# Altium PCB ISO-ASS[3]-R.PcbDoc
Units mm, origin at the board's own origin, x right, y up, seen from the top; angles counter-clockwise.
Board outline 240 x 60 mm, 2 copper layers (Top Layer, Bottom Layer); 123 components, 15 nets, 691 pads, 5 vias.
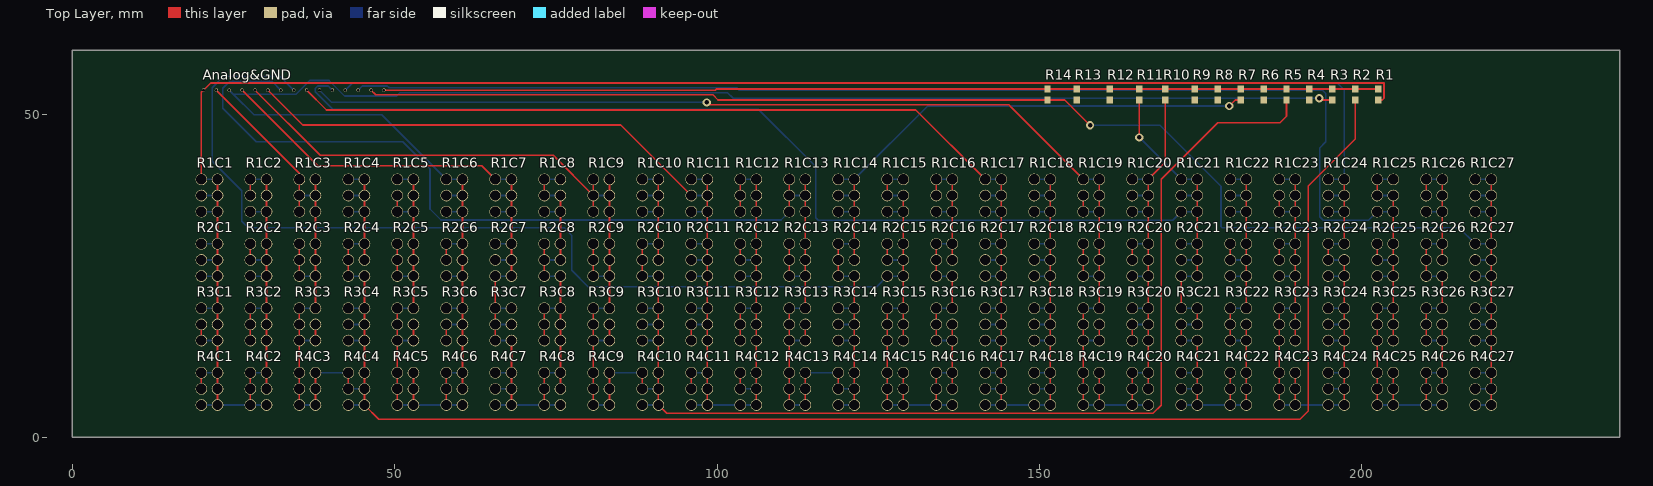
[diagram p0: Top Layer view]
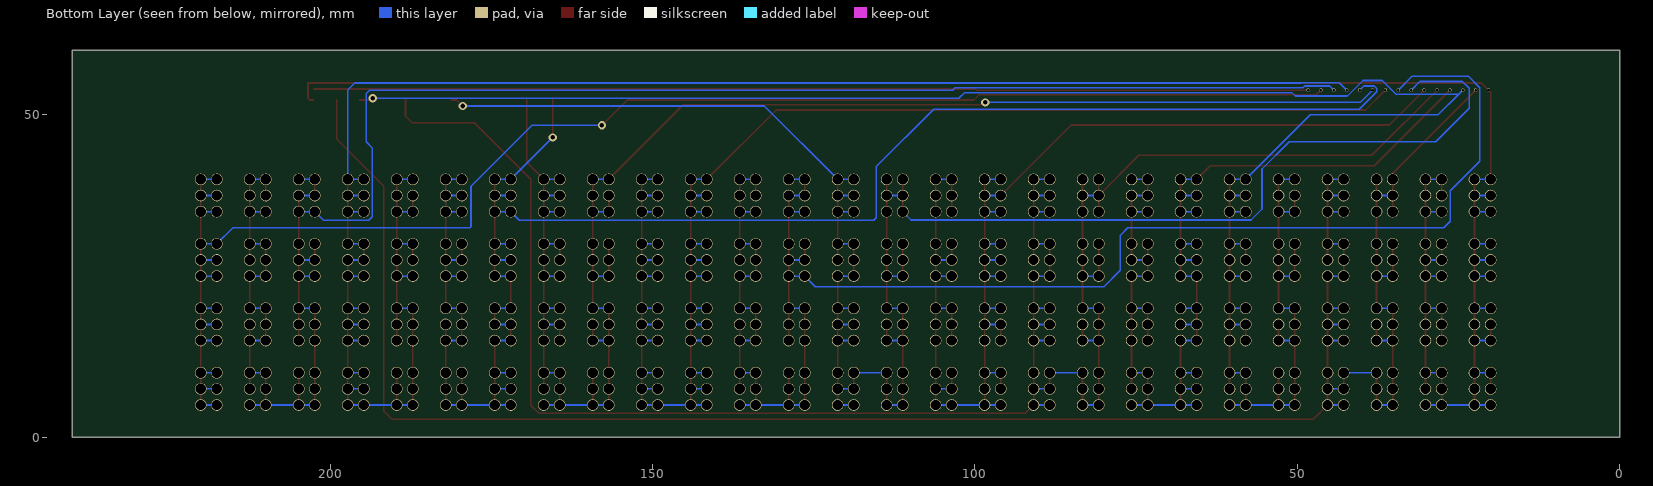
[diagram p1: Bottom Layer view, seen from below]

## Layer stack, top to bottom
Top Layer: signal copper 0.0356
Dielectric: dielectric 0.32, FR-4, Dk 4.8
Bottom Layer: signal copper 0.0356

## Board outline
0,0 0,60 240,60 240,0 0,0

## Design rules (kind name [scope] priority, off if disabled: settings)
Clearance [All] p1: gap=0.254
PolygonConnect [All] p1: connectstyle=Relief reliefconductorwidth=0.254 reliefentries=4 polygonreliefangle="90 Angle"
RoutingVias [All] p1: holewidth=0.711 width=1.27 viastyle="Through Hole" minholewidth=0.711 minwidth=1.27 maxholewidth=0.711 maxwidth=1.27
SilkscreenOverComponentPads [All] p1: minsilkscreentomaskgap=0.254
SolderMaskExpansion [All] p1: expansion=0.102
TestPointUsage [All] p1: valid=0 allowmultiple=FALSE
Testpoint [All] p1: side=15 testpointundercomponent=TRUE minsize=1.016 maxsize=2.54 preferedsize=1.524 minholesize=0 maxholesize=1.016 preferedholesize=0.813 testpointgrid=0.025 style=1023 order=0-112345678
Width [All] p1: maxlimit=0.254 minlimit=0.254 preferedwidth=0.254
23 further rules are at their usual default settings.

## Components (designator, comment, footprint, x,y, rotation, side; value= is the part's Value field where it differs from the comment)
Analog&GND "Analog_Connector" Analog_Connector 20.32,53.848 r0 top
R1 "ERA3Y" ERA-0603 202.565,53.174 r90 top
R1C1 "BC-ASS[3]" BC-ASS[3] 20,35 r0 top
R1C2 "BC-ASS[3]" BC-ASS[3] 27.6,35 r0 top
R1C3 "BC-ASS[3]" BC-ASS[3] 35.2,35 r0 top
R1C4 "BC-ASS[3]" BC-ASS[3] 42.8,35 r0 top
R1C5 "BC-ASS[3]" BC-ASS[3] 50.4,35 r0 top
R1C6 "BC-ASS[3]" BC-ASS[3] 58,35 r0 top
R1C7 "BC-ASS[3]" BC-ASS[3] 65.6,35 r0 top
R1C8 "BC-ASS[3]" BC-ASS[3] 73.2,35 r0 top
R1C9 "BC-ASS[3]" BC-ASS[3] 80.8,35 r0 top
R1C10 "BC-ASS[3]" BC-ASS[3] 88.4,35 r0 top
R1C11 "BC-ASS[3]" BC-ASS[3] 96,35 r0 top
R1C12 "BC-ASS[3]" BC-ASS[3] 103.6,35 r0 top
R1C13 "BC-ASS[3]" BC-ASS[3] 111.2,35 r0 top
R1C14 "BC-ASS[3]" BC-ASS[3] 118.8,35 r0 top
R1C15 "BC-ASS[3]" BC-ASS[3] 126.4,35 r0 top
R1C16 "BC-ASS[3]" BC-ASS[3] 134,35 r0 top
R1C17 "BC-ASS[3]" BC-ASS[3] 141.6,35 r0 top
R1C18 "BC-ASS[3]" BC-ASS[3] 149.2,35 r0 top
R1C19 "BC-ASS[3]" BC-ASS[3] 156.8,35 r0 top
R1C20 "BC-ASS[3]" BC-ASS[3] 164.4,35 r0 top
R1C21 "BC-ASS[3]" BC-ASS[3] 172,35 r0 top
R1C22 "BC-ASS[3]" BC-ASS[3] 179.6,35 r0 top
R1C23 "BC-ASS[3]" BC-ASS[3] 187.2,35 r0 top
R1C24 "BC-ASS[3]" BC-ASS[3] 194.8,35 r0 top
R1C25 "BC-ASS[3]" BC-ASS[3] 202.4,35 r0 top
R1C26 "BC-ASS[3]" BC-ASS[3] 210,35 r0 top
R1C27 "BC-ASS[3]" BC-ASS[3] 217.6,35 r0 top
R2 "ERA3Y" ERA-0603 199.009,53.174 r90 top
R2C1 "BC-ASS[3]" BC-ASS[3] 20,25 r0 top
R2C2 "BC-ASS[3]" BC-ASS[3] 27.6,25 r0 top
R2C3 "BC-ASS[3]" BC-ASS[3] 35.2,25 r0 top
R2C4 "BC-ASS[3]" BC-ASS[3] 42.8,25 r0 top
R2C5 "BC-ASS[3]" BC-ASS[3] 50.4,25 r0 top
R2C6 "BC-ASS[3]" BC-ASS[3] 58,25 r0 top
R2C7 "BC-ASS[3]" BC-ASS[3] 65.6,25 r0 top
R2C8 "BC-ASS[3]" BC-ASS[3] 73.2,25 r0 top
R2C9 "BC-ASS[3]" BC-ASS[3] 80.8,25 r0 top
R2C10 "BC-ASS[3]" BC-ASS[3] 88.4,25 r0 top
R2C11 "BC-ASS[3]" BC-ASS[3] 96,25 r0 top
R2C12 "BC-ASS[3]" BC-ASS[3] 103.6,25 r0 top
R2C13 "BC-ASS[3]" BC-ASS[3] 111.2,25 r0 top
R2C14 "BC-ASS[3]" BC-ASS[3] 118.8,25 r0 top
R2C15 "BC-ASS[3]" BC-ASS[3] 126.4,25 r0 top
R2C16 "BC-ASS[3]" BC-ASS[3] 134,25 r0 top
R2C17 "BC-ASS[3]" BC-ASS[3] 141.6,25 r0 top
R2C18 "BC-ASS[3]" BC-ASS[3] 149.2,25 r0 top
R2C19 "BC-ASS[3]" BC-ASS[3] 156.8,25 r0 top
R2C20 "BC-ASS[3]" BC-ASS[3] 164.4,25 r0 top
R2C21 "BC-ASS[3]" BC-ASS[3] 172,25 r0 top
R2C22 "BC-ASS[3]" BC-ASS[3] 179.6,25 r0 top
R2C23 "BC-ASS[3]" BC-ASS[3] 187.2,25 r0 top
R2C24 "BC-ASS[3]" BC-ASS[3] 194.8,25 r0 top
R2C25 "BC-ASS[3]" BC-ASS[3] 202.4,25 r0 top
R2C26 "BC-ASS[3]" BC-ASS[3] 210,25 r0 top
R2C27 "BC-ASS[3]" BC-ASS[3] 217.6,25 r0 top
R3 "ERA3Y" ERA-0603 195.453,53.174 r90 top
R3C1 "BC-ASS[3]" BC-ASS[3] 20,15 r0 top
R3C2 "BC-ASS[3]" BC-ASS[3] 27.6,15 r0 top
R3C3 "BC-ASS[3]" BC-ASS[3] 35.2,15 r0 top
R3C4 "BC-ASS[3]" BC-ASS[3] 42.8,15 r0 top
R3C5 "BC-ASS[3]" BC-ASS[3] 50.4,15 r0 top
R3C6 "BC-ASS[3]" BC-ASS[3] 58,15 r0 top
R3C7 "BC-ASS[3]" BC-ASS[3] 65.6,15 r0 top
R3C8 "BC-ASS[3]" BC-ASS[3] 73.2,15 r0 top
R3C9 "BC-ASS[3]" BC-ASS[3] 80.8,15 r0 top
R3C10 "BC-ASS[3]" BC-ASS[3] 88.4,15 r0 top
R3C11 "BC-ASS[3]" BC-ASS[3] 96,15 r0 top
R3C12 "BC-ASS[3]" BC-ASS[3] 103.6,15 r0 top
R3C13 "BC-ASS[3]" BC-ASS[3] 111.2,15 r0 top
R3C14 "BC-ASS[3]" BC-ASS[3] 118.8,15 r0 top
R3C15 "BC-ASS[3]" BC-ASS[3] 126.4,15 r0 top
R3C16 "BC-ASS[3]" BC-ASS[3] 134,15 r0 top
R3C17 "BC-ASS[3]" BC-ASS[3] 141.6,15 r0 top
R3C18 "BC-ASS[3]" BC-ASS[3] 149.2,15 r0 top
R3C19 "BC-ASS[3]" BC-ASS[3] 156.8,15 r0 top
R3C20 "BC-ASS[3]" BC-ASS[3] 164.4,15 r0 top
R3C21 "BC-ASS[3]" BC-ASS[3] 172,15 r0 top
R3C22 "BC-ASS[3]" BC-ASS[3] 179.6,15 r0 top
R3C23 "BC-ASS[3]" BC-ASS[3] 187.2,15 r0 top
R3C24 "BC-ASS[3]" BC-ASS[3] 194.8,15 r0 top
R3C25 "BC-ASS[3]" BC-ASS[3] 202.4,15 r0 top
R3C26 "BC-ASS[3]" BC-ASS[3] 210,15 r0 top
R3C27 "BC-ASS[3]" BC-ASS[3] 217.6,15 r0 top
R4 "ERA3Y" ERA-0603 191.897,53.174 r90 top
R4C1 "BC-ASS[3]" BC-ASS[3] 20,5 r0 top
R4C2 "BC-ASS[3]" BC-ASS[3] 27.6,5 r0 top
R4C3 "BC-ASS[3]" BC-ASS[3] 35.2,5 r0 top
R4C4 "BC-ASS[3]" BC-ASS[3] 42.8,5 r0 top
R4C5 "BC-ASS[3]" BC-ASS[3] 50.4,5 r0 top
R4C6 "BC-ASS[3]" BC-ASS[3] 58,5 r0 top
R4C7 "BC-ASS[3]" BC-ASS[3] 65.6,5 r0 top
R4C8 "BC-ASS[3]" BC-ASS[3] 73.2,5 r0 top
R4C9 "BC-ASS[3]" BC-ASS[3] 80.8,5 r0 top
R4C10 "BC-ASS[3]" BC-ASS[3] 88.4,5 r0 top
R4C11 "BC-ASS[3]" BC-ASS[3] 96,5 r0 top
R4C12 "BC-ASS[3]" BC-ASS[3] 103.6,5 r0 top
R4C13 "BC-ASS[3]" BC-ASS[3] 111.2,5 r0 top
R4C14 "BC-ASS[3]" BC-ASS[3] 118.8,5 r0 top
R4C15 "BC-ASS[3]" BC-ASS[3] 126.4,5 r0 top
R4C16 "BC-ASS[3]" BC-ASS[3] 134,5 r0 top
R4C17 "BC-ASS[3]" BC-ASS[3] 141.6,5 r0 top
R4C18 "BC-ASS[3]" BC-ASS[3] 149.2,5 r0 top
R4C19 "BC-ASS[3]" BC-ASS[3] 156.8,5 r0 top
R4C20 "BC-ASS[3]" BC-ASS[3] 164.4,5 r0 top
R4C21 "BC-ASS[3]" BC-ASS[3] 172,5 r0 top
R4C22 "BC-ASS[3]" BC-ASS[3] 179.6,5 r0 top
R4C23 "BC-ASS[3]" BC-ASS[3] 187.2,5 r0 top
R4C24 "BC-ASS[3]" BC-ASS[3] 194.8,5 r0 top
R4C25 "BC-ASS[3]" BC-ASS[3] 202.4,5 r0 top
R4C26 "BC-ASS[3]" BC-ASS[3] 210,5 r0 top
R4C27 "BC-ASS[3]" BC-ASS[3] 217.6,5 r0 top
R5 "ERA3Y" ERA-0603 188.341,53.174 r90 top
R6 "ERA3Y" ERA-0603 184.785,53.174 r90 top
R7 "ERA3Y" ERA-0603 181.229,53.174 r90 top
R8 "ERA3Y" ERA-0603 177.673,53.174 r90 top
R9 "ERA3Y" ERA-0603 174.117,53.174 r90 top
R10 "ERA3Y" ERA-0603 169.545,53.174 r90 top
R11 "ERA3Y" ERA-0603 165.481,53.174 r90 top
R12 "ERA3Y" ERA-0603 160.909,53.174 r90 top
R13 "ERA3Y" ERA-0603 155.829,53.174 r90 top
R14 "ERA3Y" ERA-0603 151.257,53.174 r90 top

## Footprints (in the part's own frame and the unit in brackets; to place one, negate y for a bottom-side part, rotate by r counter-clockwise, add the part's x,y. Pads: shape width x height; smd on the part's side, far side on the other; paste and mask are expansions set on the pad)
Analog_Connector [mm]
  round 0.5 hole 0.4: A0(0,0) A1(2,0) A2(4,0) A3(6,0) A4(8,0) A5(10,0) A6(12,0) A7(14,0) A8(16,0) A9(18,0) A10(20,0) A11(22,0) A12(24,0) A13(26,0) GND(28,0)
BC-ASS[3] [mm] "American Standard Sign [3]"
  round 1.8 hole 1.6: 1(0,5) 2(0,2.5) 3(0,0) 4(2.5,5) 5(2.5,2.5) 6(2.5,0)
ERA-0603 [mm] "Chip Resistor; Body 1.6 x 0.8 mm (LxW typ)"
  rect 1.1x1 smd: 1(-0.85,0) 2(0.85,0)

## Part data
R1 R2 R3 R4 R5 R6 R7 R8 R9 R10 R11 R12 R13 R14: "Rectangular Thick Film Chip Resistor, 10 Ohm to 330k Ohm Range, 0.1% and 0.5% Tolerance, 0603 Size, 0.063 W"

## Via types
v1: diameter 1.27, hole 0.711, Top Layer to Bottom Layer, 5 vias

## Nets (pads, with @x,y where several pads share a name; then routed paths per layer and width w, separated by ;. In a path a pad name is that pad's centre, name@x,y a point inside that pad or via, vN(x,y) a via of type N, cw(c..) or ccw(c..) an arc to the next point about the centre after c; other vN are vias at no path point)
NetAnalog&GND_A0: Analog&GND.A0 R1.1 R1C1.1 R1C1.2 R1C1.3 R1C1.4 R1C1.5 R1C1.6 R1C2.1 R1C2.2 R1C2.3 R1C2.4 R1C2.5 R1C2.6 R2C1.1 R2C1.2 R2C1.3 R2C1.4 R2C1.5 R2C1.6 R2C2.1 R2C2.2 R2C2.3 R2C2.4 R2C2.5 R2C2.6 R3C1.1 R3C1.2 R3C1.3 R3C1.4 R3C1.5 R3C1.6 R3C2.1 R3C2.2 R3C2.3 R3C2.4 R3C2.5 R3C2.6 R4C1.1 R4C1.2 R4C1.3 R4C1.4 R4C1.5 R4C1.6 R4C2.1 R4C2.2 R4C2.3 R4C2.4 R4C2.5 R4C2.6 | length 336.1
  Top Layer w0.254: R4C1.2 R4C1.1 ; R3C1.3 R3C1.2 ; R1C1.1 20,53.528 Analog&GND.A0 21.438,54.966 203.454,54.966 203.454,52.578 203.2,52.324 R1.1 ; R4C1.6 R4C1.5 R4C1.4 R3C1.6 R3C1.5 R3C1.4 R2C1.6 R2C1.5 R2C1.4 R1C1.6 R1C1.5 R1C1.4 ; R4C2.3 R4C2.2 R4C2.1 ; R3C2.3 R3C2.2 R3C2.1 ; R2C2.2 R2C2.1 ; R1C2.2 R1C2.1 ; R4C2.5 R4C2.4 R3C2.6 R3C2.5 R3C2.4 R2C2.6 R2C2.5 R2C2.4 R1C2.6 R1C2.5 R1C2.4
  Bottom Layer w0.254: R4C1.3 R4C1.6 R4C2.3 R4C2.6 ; R4C1.1 R4C1.4 ; R3C1.3 R3C1.6 ; R3C1.1 R3C1.4 ; R2C1.3 R2C1.6 ; R2C1.2 R2C1.5 ; R2C1.1 R2C1.4 ; R1C1.3 R1C1.6 ; R1C1.2 R1C1.5 ; R1C1.1 R1C1.4 ; R4C2.1 R4C2.4 ; R3C2.1 R3C2.4 ; R2C2.3 R2C2.6 ; R2C2.2 R2C2.5 ; R1C2.3 R1C2.6 ; R1C2.1 R1C2.4
NetAnalog&GND_A1: Analog&GND.A1 R1C3.1 R1C3.2 R1C3.3 R1C3.4 R1C3.5 R1C3.6 R1C4.1 R1C4.2 R1C4.3 R1C4.4 R1C4.5 R1C4.6 R2.1 R2C3.1 R2C3.2 R2C3.3 R2C3.4 R2C3.5 R2C3.6 R2C4.1 R2C4.2 R2C4.3 R2C4.4 R2C4.5 R2C4.6 R3C3.1 R3C3.2 R3C3.3 R3C3.4 R3C3.5 R3C3.6 R3C4.1 R3C4.2 R3C4.3 R3C4.4 R3C4.5 R3C4.6 R4C3.1 R4C3.2 R4C3.3 R4C3.4 R4C3.5 R4C3.6 R4C4.1 R4C4.2 R4C4.3 R4C4.4 R4C4.5 R4C4.6 | length 353.4
  Top Layer w0.254: Analog&GND.A1 35.2,40.968 R1C3.1 R1C3.2 R1C3.3 ; R4C3.3 R4C3.2 R4C3.1 R3C3.3 R3C3.2 R3C3.1 ; R2C3.3 R2C3.2 R2C3.1 ; R4C3.6 R4C3.5 R4C3.4 ; R3C3.6 R3C3.5 ; R3C3.4 R2C3.6 R2C3.5 R2C3.4 R1C3.6 R1C3.5 R1C3.4 ; R4C4.2 R4C4.1 ; R2C4.3 R2C4.2 R2C4.1 ; R2C4.6 R3C4.4 R3C4.5 R3C4.6 R4C4.4 R4C4.5 R4C4.6 47.506,2.794 190.424,2.794 191.694,4.064 191.694,38.964 199.009,46.279 R2.1 ; R2C4.5 R2C4.4 R1C4.6 R1C4.5 R1C4.4
  Bottom Layer w0.254: R4C3.3 R4C3.6 ; R3C3.3 R3C3.6 ; R3C3.1 R3C3.4 ; R2C3.3 R2C3.6 ; R1C3.2 R1C3.5 ; R4C3.4 R4C4.1 ; R4C4.3 R4C4.6 ; R4C4.2 R4C4.5 ; R3C4.3 R3C4.6 ; R3C4.2 R3C4.5 ; R3C4.1 R3C4.4 ; R2C4.3 R2C4.6 ; R2C4.1 R2C4.4 ; R1C4.3 R1C4.6 ; R1C4.2 R1C4.5 ; R1C4.1 R1C4.4
NetAnalog&GND_A2: Analog&GND.A2 R1C5.1 R1C5.2 R1C5.3 R1C5.4 R1C5.5 R1C5.6 R1C6.1 R1C6.2 R1C6.3 R1C6.4 R1C6.5 R1C6.6 R2C5.1 R2C5.2 R2C5.3 R2C5.4 R2C5.5 R2C5.6 R2C6.1 R2C6.2 R2C6.3 R2C6.4 R2C6.5 R2C6.6 R3.1 R3C5.1 R3C5.2 R3C5.3 R3C5.4 R3C5.5 R3C5.6 R3C6.1 R3C6.2 R3C6.3 R3C6.4 R3C6.5 R3C6.6 R4C5.1 R4C5.2 R4C5.3 R4C5.4 R4C5.5 R4C5.6 R4C6.1 R4C6.2 R4C6.3 R4C6.4 R4C6.5 R4C6.6 | length 348.5
  Top Layer w0.254: R4C5.3 R4C5.2 R4C5.1 R3C5.3 R3C5.2 R3C5.1 ; R2C5.3 R2C5.2 R2C5.1 ; R1C5.3 R1C5.2 ; R4C5.6 R4C5.5 R4C5.4 ; R3C5.6 R3C5.5 ; R3C5.4 R2C5.6 R2C5.5 R2C5.4 R1C5.6 R1C5.5 R1C5.4 ; R4C6.3 R4C6.2 R4C6.1 ; R3C6.3 R3C6.2 ; R2C6.2 R2C6.1 ; R4C6.5 R4C6.4 R3C6.6 R3C6.5 R3C6.4 R2C6.6 R2C6.5 R2C6.4 R1C6.6 R1C6.5 R1C6.4 ; v1(193.421,52.578) 193.675,52.324 R3.1
  Bottom Layer w0.254: R4C5.3 R4C5.6 R4C6.3 R4C6.6 ; R3C5.3 R3C5.6 ; R3C5.1 R3C5.4 ; R2C5.3 R2C5.6 ; R1C5.3 R1C5.6 ; R1C5.1 R1C5.4 ; R4C6.1 R4C6.4 ; R3C6.2 R3C6.5 ; R3C6.1 R3C6.4 ; R2C6.3 R2C6.6 ; R2C6.1 R2C6.4 ; R1C6.3 R1C6.6 ; R1C6.2 R1C6.5 ; R1C6.4 R1C6.1 47.987,50.013 28.155,50.013 24.955,53.213 ; v1(193.421,52.578) 102.489,52.578 101.6,53.467 50.8,53.467 50.267,52.934 42.215,52.934 39.802,55.347 36.805,55.347 34.671,53.213 24.955,53.213 ; 24.955,53.213 Analog&GND.A2 24.955,53.213
NetAnalog&GND_A3: Analog&GND.A3 R1C7.1 R1C7.2 R1C7.3 R1C7.4 R1C7.5 R1C7.6 R1C8.1 R1C8.2 R1C8.3 R1C8.4 R1C8.5 R1C8.6 R2C7.1 R2C7.2 R2C7.3 R2C7.4 R2C7.5 R2C7.6 R2C8.1 R2C8.2 R2C8.3 R2C8.4 R2C8.5 R2C8.6 R3C7.1 R3C7.2 R3C7.3 R3C7.4 R3C7.5 R3C7.6 R3C8.1 R3C8.2 R3C8.3 R3C8.4 R3C8.5 R3C8.6 R4C7.1 R4C7.2 R4C7.3 R4C7.4 R4C7.5 R4C7.6 R4C8.1 R4C8.2 R4C8.3 R4C8.4 R4C8.5 R4C8.6 | length 180.1
  Top Layer w0.254: Analog&GND.A3 38.055,42.113 63.487,42.113 R1C7.1 ; R3C7.3 R3C7.2 R3C7.1 R2C7.3 ; R4C7.6 R4C7.5 R4C7.4 R3C7.6 ; R2C7.6 R2C7.5 R2C7.4 R1C7.6 R1C7.5 R1C7.4 ; R4C8.3 R4C8.2 R4C8.1 ; R3C8.3 R3C8.2 R3C8.1 ; R2C8.3 R2C8.2 R2C8.1 ; R1C8.2 R1C8.1 ; R4C8.5 R4C8.4 R3C8.6 R3C8.5 R3C8.4 R2C8.6 ; R2C8.5 R2C8.4 R1C8.6 R1C8.5
  Bottom Layer w0.254: R4C7.3 R4C7.6 R4C8.3 R4C8.6 ; R4C7.2 R4C7.5 ; R4C7.1 R4C7.4 ; R3C7.3 R3C7.6 ; R3C7.2 R3C7.5 ; R3C7.1 R3C7.4 ; R2C7.3 R2C7.6 ; R2C7.2 R2C7.5 ; R2C7.1 R2C7.4 ; R1C7.3 R1C7.6 ; R1C7.2 R1C7.5 ; R1C7.1 R1C7.4 ; R4C8.1 R4C8.4 ; R3C8.1 R3C8.4 ; R2C8.3 R2C8.6 ; R2C8.2 R2C8.5 ; R1C8.3 R1C8.6 ; R1C8.2 R1C8.5 ; R1C8.1 R1C8.4
NetAnalog&GND_A4: Analog&GND.A4 R1C9.1 R1C9.2 R1C9.3 R1C9.4 R1C9.5 R1C9.6 R1C10.1 R1C10.2 R1C10.3 R1C10.4 R1C10.5 R1C10.6 R2C9.1 R2C9.2 R2C9.3 R2C9.4 R2C9.5 R2C9.6 R2C10.1 R2C10.2 R2C10.3 R2C10.4 R2C10.5 R2C10.6 R3C9.1 R3C9.2 R3C9.3 R3C9.4 R3C9.5 R3C9.6 R3C10.1 R3C10.2 R3C10.3 R3C10.4 R3C10.5 R3C10.6 R4C9.1 R4C9.2 R4C9.3 R4C9.4 R4C9.5 R4C9.6 R4C10.1 R4C10.2 R4C10.3 R4C10.4 R4C10.5 R4C10.6 R5.1 | length 334.5
  Top Layer w0.254: Analog&GND.A4 38.429,43.739 74.561,43.739 R1C9.2 ; R4C9.3 R4C9.2 R4C9.1 R3C9.3 R3C9.2 R3C9.1 ; R2C9.3 R2C9.2 R2C9.1 ; R1C9.3 R1C9.2 ; R1C9.1 R1C9.2 ; R4C9.6 R4C9.5 R4C9.4 ; R3C9.6 R3C9.5 ; R3C9.4 R2C9.6 R2C9.5 R2C9.4 R1C9.6 R1C9.5 R1C9.4 ; R4C10.2 R4C10.1 ; R2C10.3 R2C10.2 R2C10.1 ; R2C10.6 R3C10.4 R3C10.5 R3C10.6 R4C10.4 R4C10.5 R4C10.6 92.192,3.708 167.64,3.708 168.91,4.978 168.91,40.005 177.673,48.768 187.325,48.768 188.341,49.784 R5.1 ; R2C10.5 R2C10.4 R1C10.6 R1C10.5 R1C10.4
  Bottom Layer w0.254: R4C9.3 R4C9.6 ; R3C9.3 R3C9.6 ; R3C9.1 R3C9.4 ; R2C9.3 R2C9.6 ; R1C9.2 R1C9.5 ; R4C9.4 R4C10.1 ; R4C10.3 R4C10.6 ; R4C10.2 R4C10.5 ; R3C10.3 R3C10.6 ; R3C10.2 R3C10.5 ; R3C10.1 R3C10.4 ; R2C10.3 R2C10.6 ; R2C10.1 R2C10.4 ; R1C10.3 R1C10.6 ; R1C10.2 R1C10.5 ; R1C10.1 R1C10.4
NetAnalog&GND_A5: Analog&GND.A5 R1C11.1 R1C11.2 R1C11.3 R1C11.4 R1C11.5 R1C11.6 R1C12.1 R1C12.2 R1C12.3 R1C12.4 R1C12.5 R1C12.6 R2C11.1 R2C11.2 R2C11.3 R2C11.4 R2C11.5 R2C11.6 R2C12.1 R2C12.2 R2C12.3 R2C12.4 R2C12.5 R2C12.6 R3C11.1 R3C11.2 R3C11.3 R3C11.4 R3C11.5 R3C11.6 R3C12.1 R3C12.2 R3C12.3 R3C12.4 R3C12.5 R3C12.6 R4C11.1 R4C11.2 R4C11.3 R4C11.4 R4C11.5 R4C11.6 R4C12.1 R4C12.2 R4C12.3 R4C12.4 R4C12.5 R4C12.6 | length 207.6
  Top Layer w0.254: Analog&GND.A5 35.73,48.438 85.062,48.438 R1C11.2 ; R4C11.2 R4C11.1 ; R3C11.3 R3C11.2 ; R4C11.6 R4C11.5 R4C11.4 R3C11.6 R3C11.5 R3C11.4 R2C11.6 R2C11.5 R2C11.4 R1C11.6 R1C11.5 R1C11.4 ; R4C12.2 R4C12.1 ; R3C12.3 R3C12.2 R3C12.1 ; R2C12.2 R2C12.1 ; R1C12.3 R1C12.2 R1C12.1 ; R4C12.6 R4C12.5 R4C12.4 R3C12.6 R3C12.5 R3C12.4 R2C12.6 R2C12.5 R2C12.4 R1C12.6 R1C12.5 R1C12.4
  Bottom Layer w0.254: R4C11.3 R4C11.6 R4C12.3 R4C12.6 ; R4C11.1 R4C11.4 ; R3C11.2 R3C11.5 ; R3C11.1 R3C11.4 ; R2C11.3 R2C11.6 ; R2C11.2 R2C11.5 ; R2C11.1 R2C11.4 ; R1C11.3 R1C11.6 ; R1C11.2 R1C11.5 ; R1C11.1 R1C11.4 ; R4C12.2 R4C12.5 ; R3C12.1 R3C12.4 ; R2C12.3 R2C12.6 ; R2C12.2 R2C12.5 ; R1C12.1 R1C12.4
NetAnalog&GND_A6: Analog&GND.A6 R1C13.1 R1C13.2 R1C13.3 R1C13.4 R1C13.5 R1C13.6 R1C14.1 R1C14.2 R1C14.3 R1C14.4 R1C14.5 R1C14.6 R2C13.1 R2C13.2 R2C13.3 R2C13.4 R2C13.5 R2C13.6 R2C14.1 R2C14.2 R2C14.3 R2C14.4 R2C14.5 R2C14.6 R3C13.1 R3C13.2 R3C13.3 R3C13.4 R3C13.5 R3C13.6 R3C14.1 R3C14.2 R3C14.3 R3C14.4 R3C14.5 R3C14.6 R4C13.1 R4C13.2 R4C13.3 R4C13.4 R4C13.5 R4C13.6 R4C14.1 R4C14.2 R4C14.3 R4C14.4 R4C14.5 R4C14.6 R7.1 | length 312.5
  Top Layer w0.254: R4C13.3 R4C13.2 R4C13.1 R3C13.3 R3C13.2 R3C13.1 ; R2C13.3 R2C13.2 R2C13.1 ; R1C13.3 R1C13.2 R1C13.1 ; R4C13.6 R4C13.5 R4C13.4 ; R3C13.6 R3C13.5 ; R3C13.4 R2C13.6 R2C13.5 R2C13.4 R1C13.6 R1C13.5 R1C13.4 ; R4C14.2 R4C14.1 ; R2C14.3 R2C14.2 R2C14.1 ; R4C14.6 R4C14.5 R4C14.4 R3C14.6 R3C14.5 R3C14.4 R2C14.6 ; R2C14.5 R2C14.4 R1C14.6 R1C14.5 R1C14.4 ; v1(179.451,51.384) 180.391,52.324 R7.1
  Bottom Layer w0.254: Analog&GND.A6 30.974,55.194 24.384,55.194 23.32,54.13 23.32,51.029 28.528,45.822 51.257,45.822 55.474,41.605 55.474,35.408 57.175,33.706 109.906,33.706 R1C13.3 ; R4C13.3 R4C13.6 ; R3C13.3 R3C13.6 ; R3C13.1 R3C13.4 ; R2C13.3 R2C13.6 ; R1C13.2 R1C13.5 ; R4C13.4 R4C14.1 ; R4C14.3 R4C14.6 ; R4C14.2 R4C14.5 ; R3C14.3 R3C14.6 ; R3C14.2 R3C14.5 ; R3C14.1 R3C14.4 ; R2C14.3 R2C14.6 ; R2C14.1 R2C14.4 ; R1C14.3 R1C14.6 ; R1C14.2 R1C14.5 ; R1C14.1 R1C14.4 132.684,51.384 v1(179.451,51.384)
NetAnalog&GND_A7: Analog&GND.A7 R1C15.1 R1C15.2 R1C15.3 R1C15.4 R1C15.5 R1C15.6 R1C16.1 R1C16.2 R1C16.3 R1C16.4 R1C16.5 R1C16.6 R2C15.1 R2C15.2 R2C15.3 R2C15.4 R2C15.5 R2C15.6 R2C16.1 R2C16.2 R2C16.3 R2C16.4 R2C16.5 R2C16.6 R3C15.1 R3C15.2 R3C15.3 R3C15.4 R3C15.5 R3C15.6 R3C16.1 R3C16.2 R3C16.3 R3C16.4 R3C16.5 R3C16.6 R4C15.1 R4C15.2 R4C15.3 R4C15.4 R4C15.5 R4C15.6 R4C16.1 R4C16.2 R4C16.3 R4C16.4 R4C16.5 R4C16.6 | length 280.2
  Top Layer w0.254: R4C15.3 R4C15.2 R4C15.1 R3C15.3 R3C15.2 R3C15.1 ; R2C15.2 R2C15.1 ; R1C15.2 R1C15.1 ; R4C15.6 R4C15.5 R4C15.4 ; R3C15.6 R3C15.5 R3C15.4 R2C15.6 R2C15.5 R2C15.4 R1C15.6 R1C15.5 ; R4C16.3 R4C16.2 R4C16.1 ; R3C16.3 R3C16.2 R3C16.1 ; R2C16.3 R2C16.2 R2C16.1 ; R1C16.2 R1C16.1 ; R4C16.5 R4C16.4 R3C16.6 R3C16.5 ; R3C16.4 R2C16.6 ; R2C16.5 R2C16.4 R1C16.6 R1C16.5 R1C16.4
  Bottom Layer w0.254: Analog&GND.A7 32.186,55.982 23.419,55.982 21.666,54.229 21.666,42.799 26.238,38.227 26.238,33.528 27.28,32.487 76.276,32.487 77.47,31.293 77.47,25.883 79.985,23.368 124.768,23.368 R2C15.3 R2C15.6 ; R4C15.3 R4C15.6 R4C16.3 R4C16.6 ; R3C15.1 R3C15.4 ; R2C15.2 R2C15.5 ; R1C15.3 R1C15.6 ; R1C15.2 R1C15.5 ; R1C15.1 R1C15.4 ; R4C16.1 R4C16.4 ; R3C16.3 R3C16.6 ; R3C16.1 R3C16.4 ; R2C16.3 R2C16.6 ; R2C16.1 R2C16.4 ; R1C16.3 R1C16.6 ; R1C16.1 R1C16.4
NetAnalog&GND_A8: Analog&GND.A8 R1C17.1 R1C17.2 R1C17.3 R1C17.4 R1C17.5 R1C17.6 R1C18.1 R1C18.2 R1C18.3 R1C18.4 R1C18.5 R1C18.6 R2C17.1 R2C17.2 R2C17.3 R2C17.4 R2C17.5 R2C17.6 R2C18.1 R2C18.2 R2C18.3 R2C18.4 R2C18.5 R2C18.6 R3C17.1 R3C17.2 R3C17.3 R3C17.4 R3C17.5 R3C17.6 R3C18.1 R3C18.2 R3C18.3 R3C18.4 R3C18.5 R3C18.6 R4C17.1 R4C17.2 R4C17.3 R4C17.4 R4C17.5 R4C17.6 R4C18.1 R4C18.2 R4C18.3 R4C18.4 R4C18.5 R4C18.6 | length 246.1
  Top Layer w0.254: Analog&GND.A8 39.393,50.775 130.825,50.775 R1C17.1 ; R4C17.6 R4C17.5 R4C17.4 R3C17.6 R3C17.5 R3C17.4 R2C17.6 R2C17.5 R2C17.4 R1C17.6 R1C17.5 R1C17.4 ; R4C18.6 R4C18.5 R4C18.4 R3C18.6 R3C18.5 R3C18.4 R2C18.6 R2C18.5 R2C18.4 R1C18.6 R1C18.5 R1C18.4
  Bottom Layer w0.254: R4C17.3 R4C17.6 R4C18.3 R4C18.6 ; R4C17.2 R4C17.5 ; R4C17.1 R4C17.4 ; R3C17.3 R3C17.6 ; R3C17.2 R3C17.5 ; R3C17.1 R3C17.4 ; R2C17.3 R2C17.6 ; R2C17.2 R2C17.5 ; R2C17.1 R2C17.4 ; R1C17.3 R1C17.6 ; R1C17.2 R1C17.5 ; R1C17.1 R1C17.4 ; R4C18.2 R4C18.5 ; R4C18.1 R4C18.4 ; R3C18.3 R3C18.6 ; R3C18.2 R3C18.5 ; R3C18.1 R3C18.4 ; R2C18.3 R2C18.6 ; R2C18.2 R2C18.5 ; R2C18.1 R2C18.4 ; R1C18.3 R1C18.6 ; R1C18.2 R1C18.5 ; R1C18.1 R1C18.4
NetAnalog&GND_A9: Analog&GND.A9 R1C19.1 R1C19.2 R1C19.3 R1C19.4 R1C19.5 R1C19.6 R1C20.1 R1C20.2 R1C20.3 R1C20.4 R1C20.5 R1C20.6 R2C19.1 R2C19.2 R2C19.3 R2C19.4 R2C19.5 R2C19.6 R2C20.1 R2C20.2 R2C20.3 R2C20.4 R2C20.5 R2C20.6 R3C19.1 R3C19.2 R3C19.3 R3C19.4 R3C19.5 R3C19.6 R3C20.1 R3C20.2 R3C20.3 R3C20.4 R3C20.5 R3C20.6 R4C19.1 R4C19.2 R4C19.3 R4C19.4 R4C19.5 R4C19.6 R4C20.1 R4C20.2 R4C20.3 R4C20.4 R4C20.5 R4C20.6 R10.1 | length 272.7
  Top Layer w0.254: v1(98.4,51.943) 98.781,51.562 145.238,51.562 R1C19.1 ; R4C19.3 R4C19.2 R4C19.1 R3C19.3 R3C19.2 R3C19.1 ; R2C19.3 R2C19.2 R2C19.1 ; R1C19.3 R1C19.2 ; R4C19.6 R4C19.5 R4C19.4 ; R3C19.6 R3C19.5 ; R3C19.4 R2C19.6 R2C19.5 R2C19.4 R1C19.6 R1C19.5 R1C19.4 ; R4C20.3 R4C20.2 R4C20.1 ; R3C20.3 R3C20.2 ; R2C20.2 R2C20.1 ; R4C20.5 R4C20.4 R3C20.6 R3C20.5 R3C20.4 R2C20.6 R2C20.5 R2C20.4 R1C20.6 R1C20.5 R1C20.4 169.545,42.645 R10.1
  Bottom Layer w0.254: Analog&GND.A9 40.225,51.943 v1(98.4,51.943) ; R4C19.3 R4C19.6 R4C20.3 R4C20.6 ; R3C19.3 R3C19.6 ; R3C19.1 R3C19.4 ; R2C19.3 R2C19.6 ; R1C19.3 R1C19.6 ; R1C19.1 R1C19.4 ; R4C20.1 R4C20.4 ; R3C20.2 R3C20.5 ; R3C20.1 R3C20.4 ; R2C20.3 R2C20.6 ; R2C20.1 R2C20.4 ; R1C20.3 R1C20.6 ; R1C20.2 R1C20.5 ; R1C20.1 R1C20.4
NetAnalog&GND_A10: Analog&GND.A10 R1C21.1 R1C21.2 R1C21.3 R1C21.4 R1C21.5 R1C21.6 R1C22.1 R1C22.2 R1C22.3 R1C22.4 R1C22.5 R1C22.6 R2C21.1 R2C21.2 R2C21.3 R2C21.4 R2C21.5 R2C21.6 R2C22.1 R2C22.2 R2C22.3 R2C22.4 R2C22.5 R2C22.6 R3C21.1 R3C21.2 R3C21.3 R3C21.4 R3C21.5 R3C21.6 R3C22.1 R3C22.2 R3C22.3 R3C22.4 R3C22.5 R3C22.6 R4C21.1 R4C21.2 R4C21.3 R4C21.4 R4C21.5 R4C21.6 R4C22.1 R4C22.2 R4C22.3 R4C22.4 R4C22.5 R4C22.6 R11.1 | length 301.5
  Top Layer w0.254: v1(165.481,46.519) R11.1 ; R3C21.3 R3C21.2 ; R3C21.1 R2C21.3 ; R4C21.6 R4C21.5 R4C21.4 R3C21.6 ; R3C21.5 R3C21.4 ; R2C21.6 R2C21.5 R2C21.4 R1C21.6 R1C21.5 R1C21.4 ; R4C22.3 R4C22.2 R4C22.1 ; R3C22.3 R3C22.2 R3C22.1 ; R2C22.2 R2C22.1 ; R4C22.6 R4C22.5 R4C22.4 R3C22.6 R3C22.5 ; R3C22.4 R2C22.6 R2C22.5 R2C22.4 R1C22.6 R1C22.5 R1C22.4
  Bottom Layer w0.254: Analog&GND.A10 39.685,54.483 38.049,54.483 37.668,54.102 37.668,53.594 40.361,50.902 106.401,50.902 115.291,42.012 115.291,34.061 115.672,33.68 170.68,33.68 R1C21.3 R1C21.6 ; v1(165.481,46.519) R1C21.1 R1C21.4 ; R4C21.3 R4C21.6 R4C22.3 R4C22.6 ; R4C21.2 R4C21.5 ; R4C21.1 R4C21.4 ; R3C21.3 R3C21.6 ; R3C21.2 R3C21.5 ; R3C21.1 R3C21.4 ; R2C21.3 R2C21.6 ; R2C21.2 R2C21.5 ; R2C21.1 R2C21.4 ; R1C21.2 R1C21.5 ; R3C22.3 R3C22.6 ; R3C22.1 R3C22.4 ; R2C22.3 R2C22.6 ; R2C22.2 R2C22.5 ; R1C22.3 R1C22.6 ; R1C22.2 R1C22.5 ; R1C22.1 R1C22.4
NetAnalog&GND_A11: Analog&GND.A11 R1C23.1 R1C23.2 R1C23.3 R1C23.4 R1C23.5 R1C23.6 R1C24.1 R1C24.2 R1C24.3 R1C24.4 R1C24.5 R1C24.6 R2C23.1 R2C23.2 R2C23.3 R2C23.4 R2C23.5 R2C23.6 R2C24.1 R2C24.2 R2C24.3 R2C24.4 R2C24.5 R2C24.6 R3C23.1 R3C23.2 R3C23.3 R3C23.4 R3C23.5 R3C23.6 R3C24.1 R3C24.2 R3C24.3 R3C24.4 R3C24.5 R3C24.6 R4C23.1 R4C23.2 R4C23.3 R4C23.4 R4C23.5 R4C23.6 R4C24.1 R4C24.2 R4C24.3 R4C24.4 R4C24.5 R4C24.6 | length 304.9
  Top Layer w0.254: R4C23.3 R4C23.2 R4C23.1 R3C23.3 R3C23.2 R3C23.1 ; R2C23.2 R2C23.1 ; R1C23.3 R1C23.2 ; R4C23.6 R4C23.5 R4C23.4 ; R3C23.6 R3C23.5 R3C23.4 R2C23.6 R2C23.5 R2C23.4 R1C23.6 R1C23.5 R1C23.4 ; R2C24.2 R2C24.1 ; R4C24.6 R4C24.5 R4C24.4 R3C24.6 R3C24.5 R3C24.4 R2C24.6 R2C24.5 ; R2C24.4 R1C24.6 R1C24.5 R1C24.4
  Bottom Layer w0.254: Analog&GND.A11 43.459,54.987 49.434,54.987 49.455,54.966 196.19,54.966 197.3,53.855 R1C24.4 R1C24.1 ; R4C23.3 R4C23.6 R4C24.3 R4C24.6 ; R3C23.1 R3C23.4 ; R2C23.3 R2C23.6 ; R2C23.1 R2C23.4 ; R1C23.3 R1C23.6 ; R1C23.1 R1C23.4 ; R4C24.2 R4C24.5 ; R4C24.1 R4C24.4 ; R3C24.3 R3C24.6 ; R3C24.2 R3C24.5 ; R3C24.1 R3C24.4 ; R2C24.3 R2C24.6 ; R2C24.2 R2C24.5 ; R2C24.1 R2C24.4 ; R1C24.3 R1C24.6 ; R1C24.2 R1C24.5
NetAnalog&GND_A12: Analog&GND.A12 R1C25.1 R1C25.2 R1C25.3 R1C25.4 R1C25.5 R1C25.6 R1C26.1 R1C26.2 R1C26.3 R1C26.4 R1C26.5 R1C26.6 R2C25.1 R2C25.2 R2C25.3 R2C25.4 R2C25.5 R2C25.6 R2C26.1 R2C26.2 R2C26.3 R2C26.4 R2C26.5 R2C26.6 R3C25.1 R3C25.2 R3C25.3 R3C25.4 R3C25.5 R3C25.6 R3C26.1 R3C26.2 R3C26.3 R3C26.4 R3C26.5 R3C26.6 R4C25.1 R4C25.2 R4C25.3 R4C25.4 R4C25.5 R4C25.6 R4C26.1 R4C26.2 R4C26.3 R4C26.4 R4C26.5 R4C26.6 | length 315.2
  Top Layer w0.254: R4C25.3 R4C25.2 R4C25.1 R3C25.3 R3C25.2 R3C25.1 ; R2C25.2 R2C25.1 ; R1C25.2 R1C25.1 ; R4C25.6 R4C25.5 R4C25.4 ; R3C25.6 R3C25.5 R3C25.4 R2C25.6 R2C25.5 R2C25.4 R1C25.6 R1C25.5 ; R4C26.3 R4C26.2 R4C26.1 ; R3C26.3 R3C26.2 R3C26.1 ; R2C26.3 R2C26.2 R2C26.1 ; R1C26.2 R1C26.1 ; R4C26.5 R4C26.4 R3C26.6 R3C26.5 ; R3C26.4 R2C26.6 ; R2C26.5 R2C26.4 R1C26.6 R1C26.5 R1C26.4
  Bottom Layer w0.254: Analog&GND.A12 44.951,54.479 48.848,54.479 49.124,54.204 103.099,54.204 103.454,53.848 193.929,53.848 194.437,53.34 194.437,45.822 193.497,44.882 193.497,34.214 194.056,33.655 201.055,33.655 R1C25.3 R1C25.6 ; R4C25.3 R4C25.6 R4C26.3 R4C26.6 ; R3C25.1 R3C25.4 ; R2C25.3 R2C25.6 ; R2C25.2 R2C25.5 ; R1C25.2 R1C25.5 ; R1C25.1 R1C25.4 ; R4C26.1 R4C26.4 ; R3C26.3 R3C26.6 ; R3C26.1 R3C26.4 ; R2C26.3 R2C26.6 ; R2C26.1 R2C26.4 ; R1C26.3 R1C26.6 ; R1C26.1 R1C26.4
NetAnalog&GND_A13: Analog&GND.A13 R1C27.1 R1C27.2 R1C27.3 R1C27.4 R1C27.5 R1C27.6 R2C27.1 R2C27.2 R2C27.3 R2C27.4 R2C27.5 R2C27.6 R3C27.1 R3C27.2 R3C27.3 R3C27.4 R3C27.5 R3C27.6 R4C27.1 R4C27.2 R4C27.3 R4C27.4 R4C27.5 R4C27.6 R14.1 | length 249.8
  Top Layer w0.254: Analog&GND.A13 47.057,53.111 99.365,53.111 100.152,52.324 R14.1 153.949,52.324 v1(157.861,48.412) ; R4C27.6 R4C27.5 R4C27.4 R3C27.6 R3C27.5 R3C27.4 R2C27.6 R2C27.5 R2C27.4 R1C27.6 R1C27.5 R1C27.4
  Bottom Layer w0.254: v1(157.861,48.412) 168.707,48.412 178.181,38.938 178.181,32.664 178.333,32.512 215.088,32.512 R2C27.1 R2C27.4 ; R4C27.3 R4C27.6 ; R4C27.2 R4C27.5 ; R4C27.1 R4C27.4 ; R3C27.3 R3C27.6 ; R3C27.2 R3C27.5 ; R3C27.1 R3C27.4 ; R2C27.3 R2C27.6 ; R2C27.2 R2C27.5 ; R1C27.3 R1C27.6 ; R1C27.2 R1C27.5 ; R1C27.1 R1C27.4
NetAnalog&GND_GND: Analog&GND.GND R1.2 R2.2 R3.2 R4.2 R5.2 R6.2 R7.2 R8.2 R9.2 R10.2 R11.2 R12.2 R13.2 R14.2 | length 154.3
  Top Layer w0.254: Analog&GND.GND 99.695,53.848 99.871,54.024 R14.2 R13.2 R12.2 R11.2 R10.2 R9.2 R8.2 R7.2 R6.2 R5.2 R4.2 R3.2 R2.2 R1.2
pads on no net: R4.1 R6.1 R8.1 R9.1 R12.1 R13.1